# Altium PCB PCB1.PcbDoc
Units mil, origin at the board's own origin, x right, y up, seen from the top; angles counter-clockwise.
Board outline 4370 x 4200 mil, 2 copper layers (Top Layer, Bottom Layer); 73 components, 53 nets, 229 pads, 24 vias.
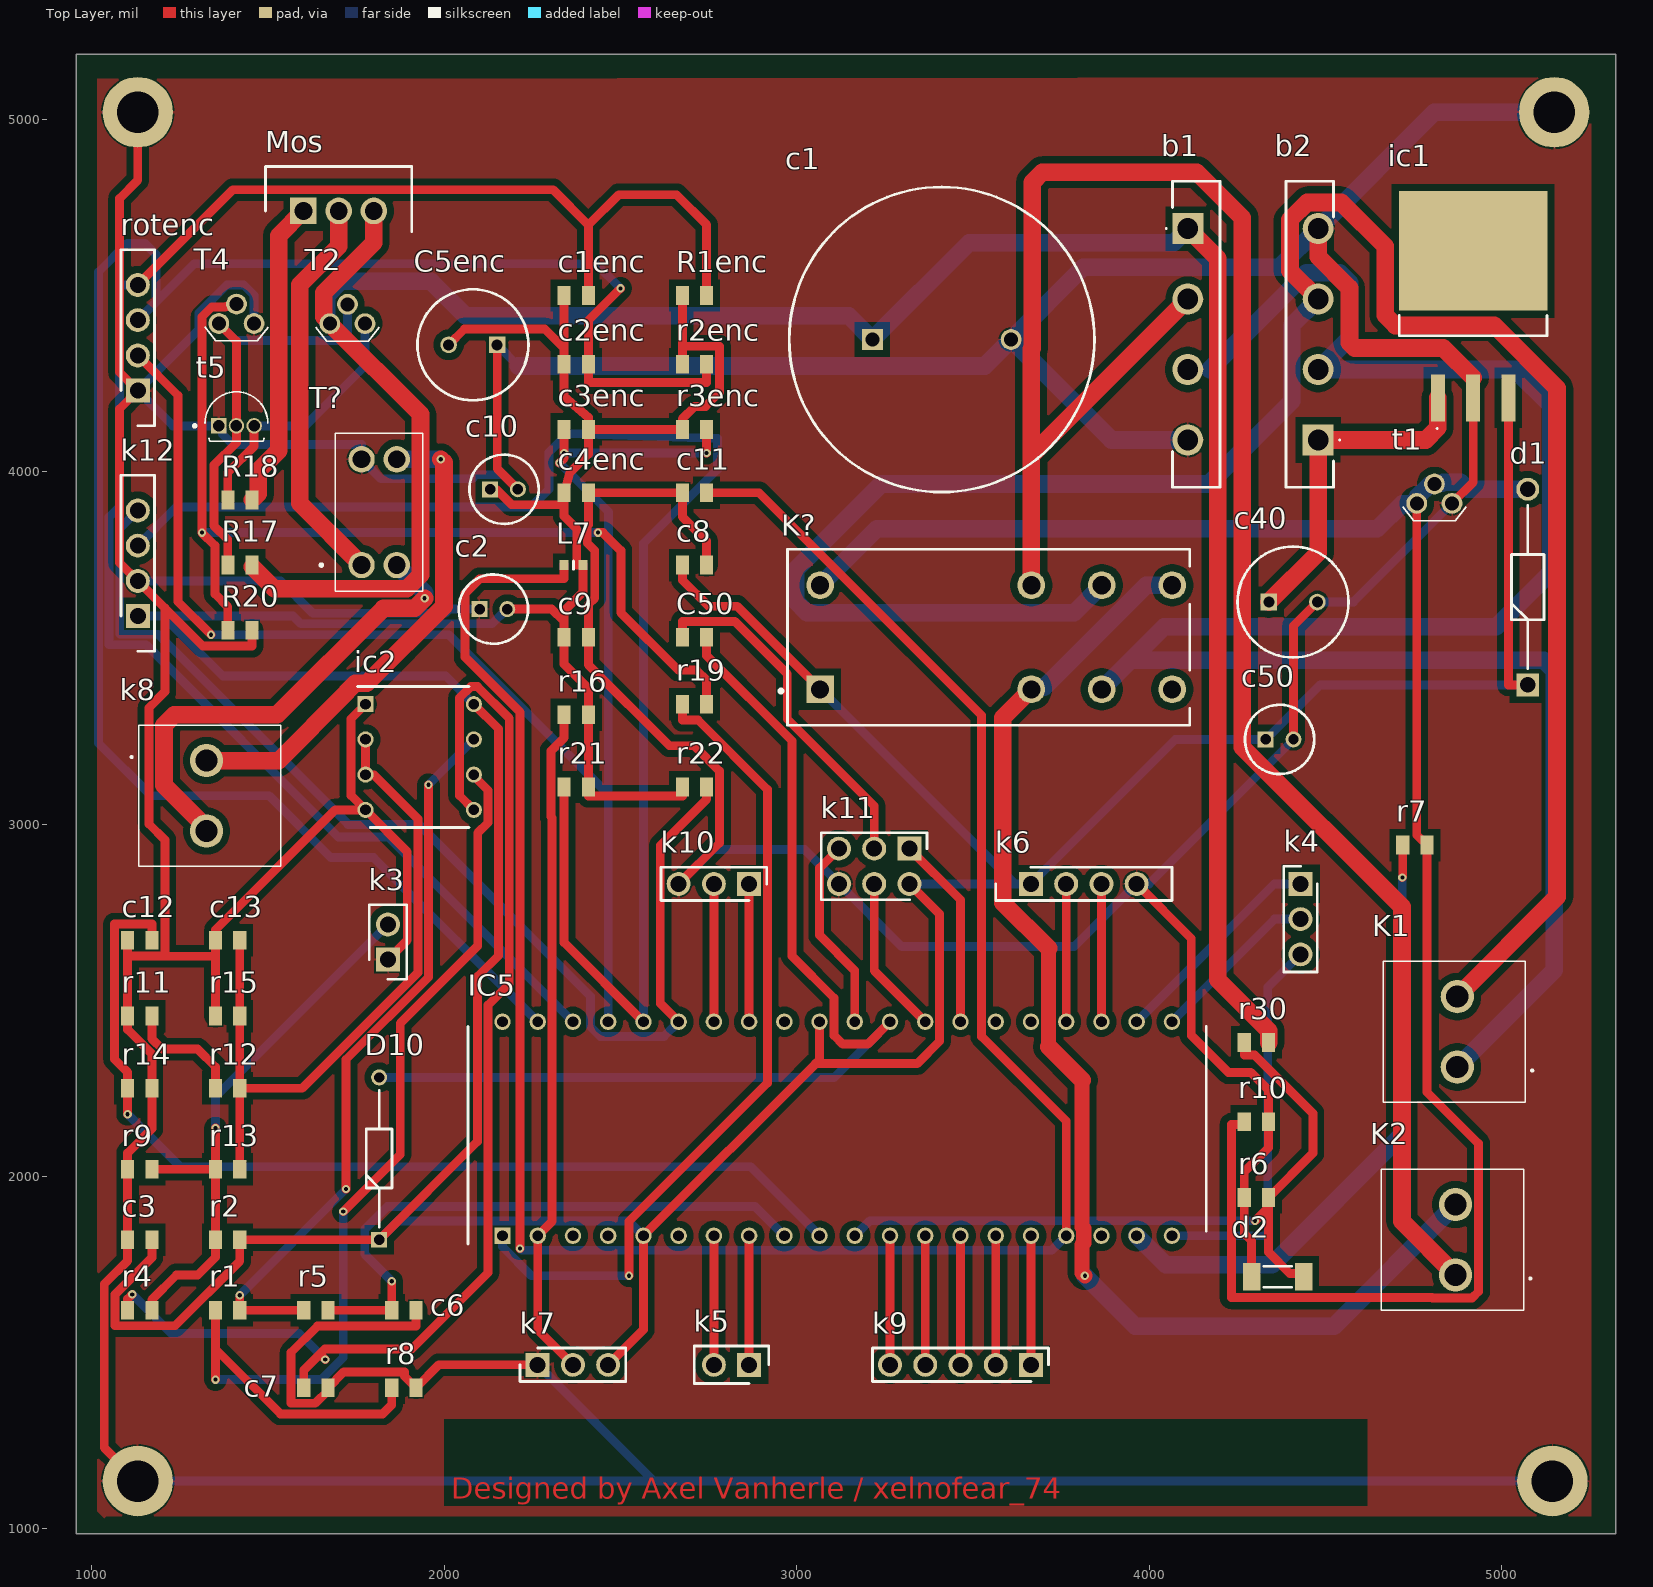
[diagram p0: Top Layer view]
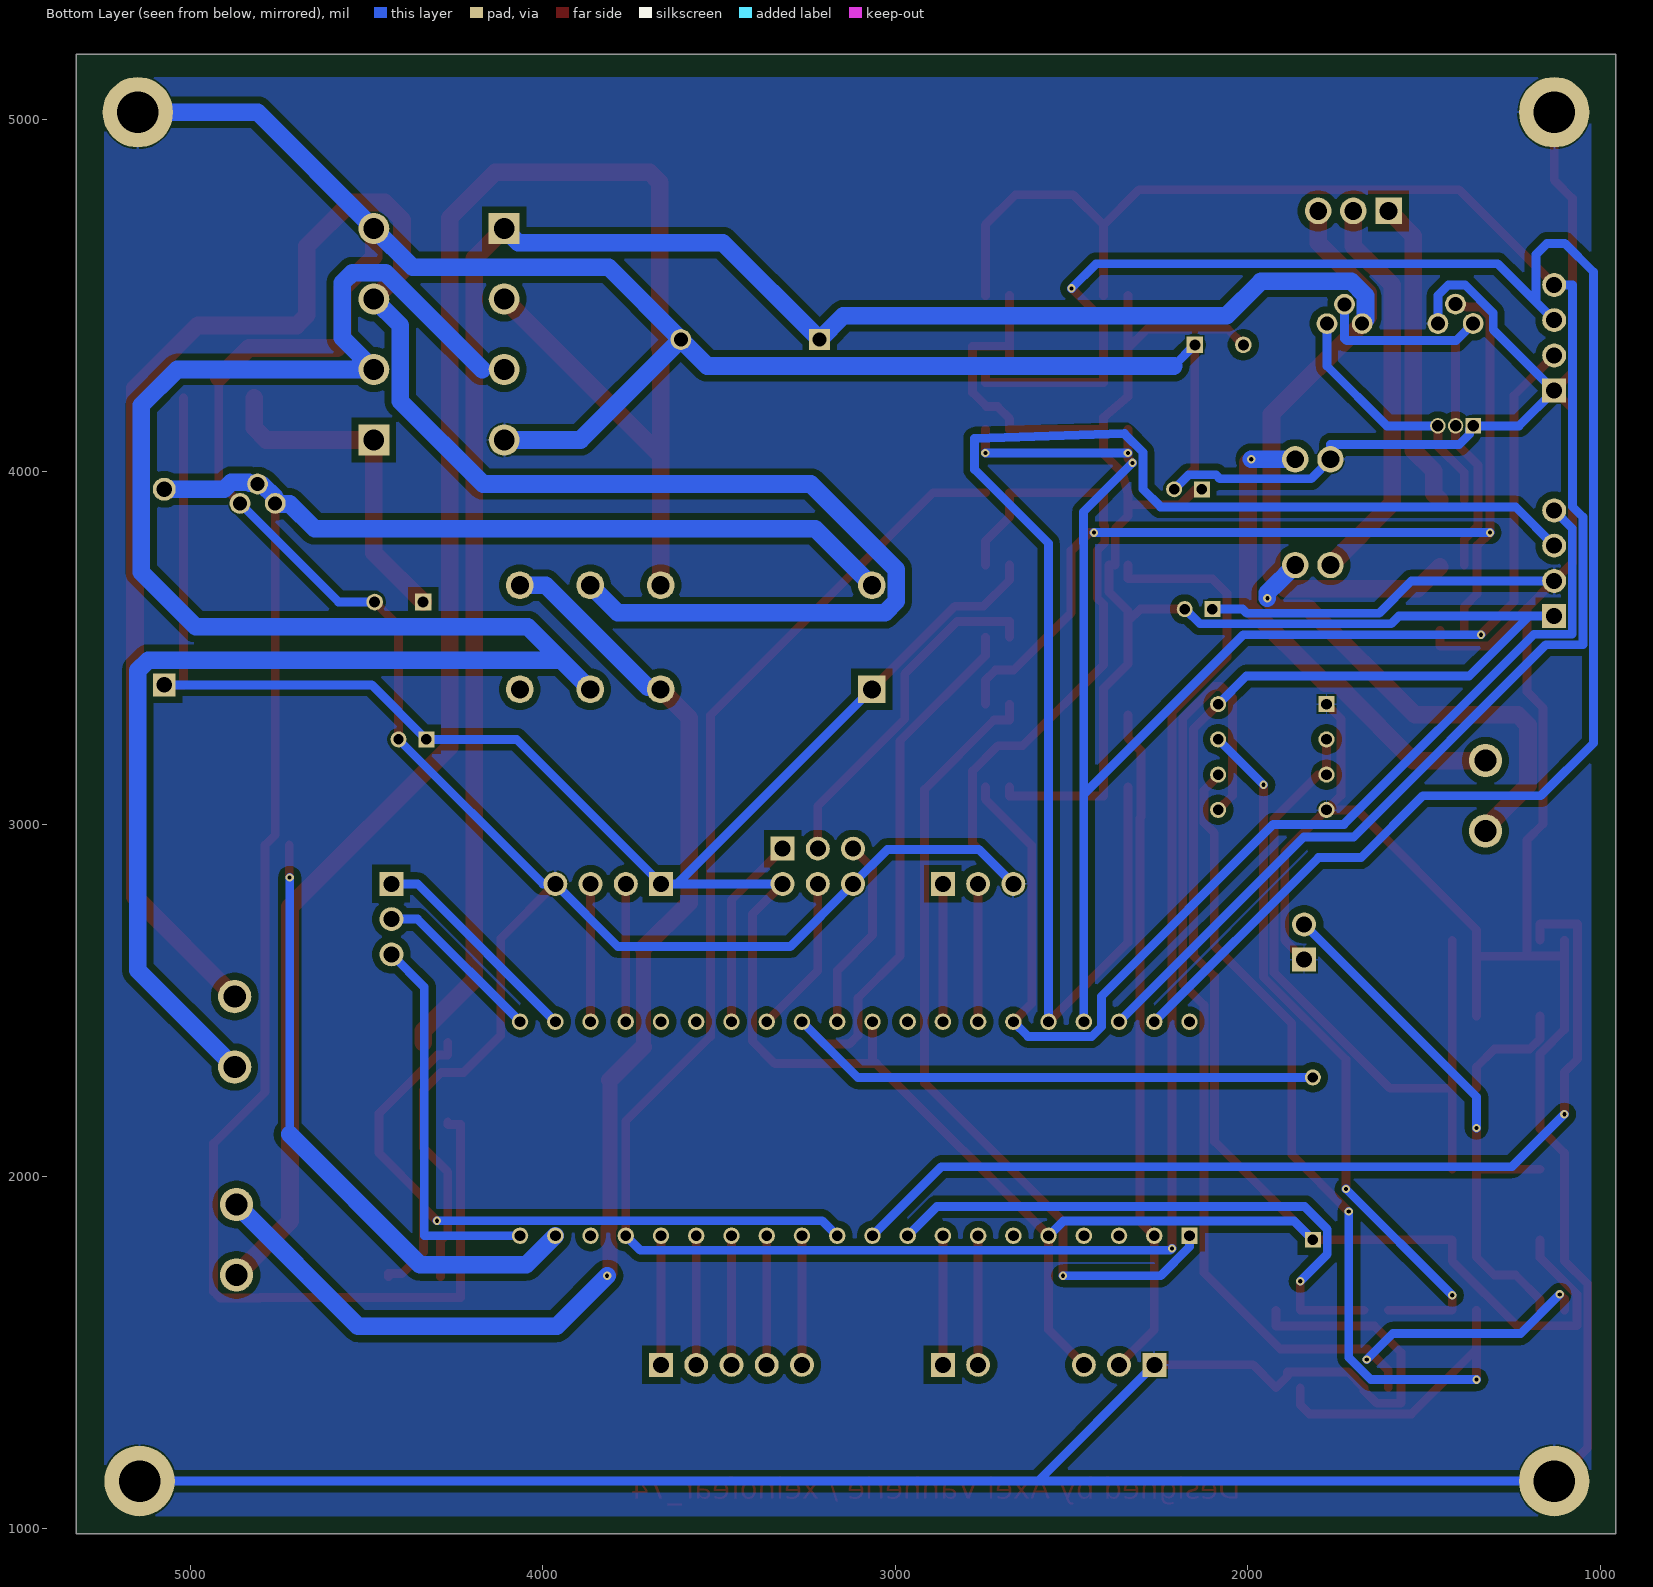
[diagram p1: Bottom Layer view, seen from below]
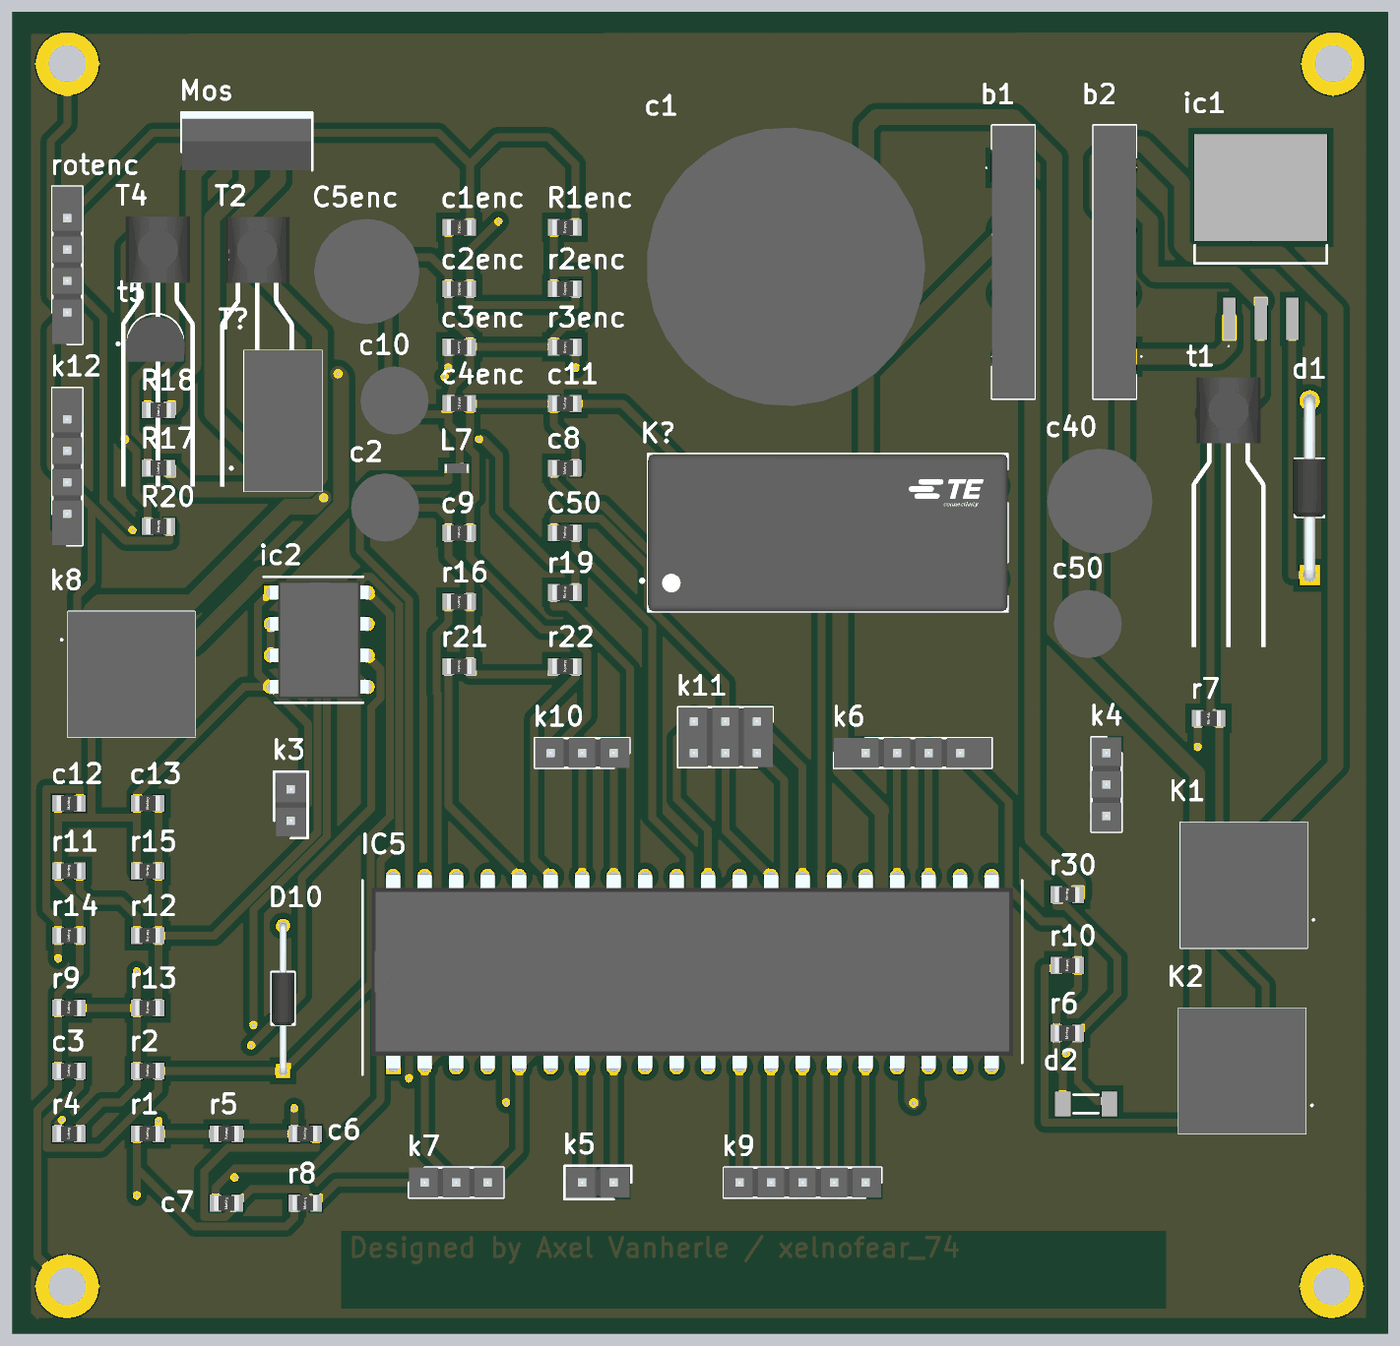
[diagram p2: 3D render of the assembled board from above, using the file's embedded part models]

## Layer stack, top to bottom
Top Solder: solder mask 0.4, Solder Resist, Dk 3.5
Top Layer: signal copper 1.4
Dielectric 1: dielectric 12.6, FR-4, Dk 4.8
Bottom Layer: signal copper 1.4
Bottom Solder: solder mask 0.4, Solder Resist, Dk 3.5

## Board outline
955,985 5325,985 5325,5185 955,5185

## Design rules (kind name [scope] priority, off if disabled: settings)
BoardOutlineClearance [All] p1: gap=7.87 ignorepadtopadclearanceinfootprint=FALSE
Clearance Clearance_8 [InNamedPolygon('GND_L02_P002')] p1: gap=20 ignorepadtopadclearanceinfootprint=FALSE
Clearance Clearance_7 [InNamedPolygon('GND_L01_P001')] p2: gap=20 ignorepadtopadclearanceinfootprint=FALSE
Clearance Clearance_6 [InNamedPolygon('GND_L01_P001')] p3: gap=25 ignorepadtopadclearanceinfootprint=FALSE
Clearance Clearance_5 [InNamedPolygon('NONET_L01_P000')] p4: gap=40 ignorepadtopadclearanceinfootprint=FALSE
Clearance Clearance_4 [InNamedPolygon('NONET_L02_P001')] p5: gap=40 ignorepadtopadclearanceinfootprint=FALSE
Clearance Clearance_3 [InNamedPolygon('NONET_L01_P000')] p6: gap=20 ignorepadtopadclearanceinfootprint=FALSE
Clearance Clearance_2 [InNamedPolygon('GND_L02_P001')] p7: gap=15 ignorepadtopadclearanceinfootprint=FALSE
Clearance Clearance_1 [InNamedPolygon('NONET_L01_P000')] p8: gap=15 ignorepadtopadclearanceinfootprint=FALSE
Clearance [All] p9: gap=5 ignorepadtopadclearanceinfootprint=FALSE except(9.84: Arc-Hole Track-Hole SMDPad-Hole THPad-Hole Via-Hole Fill-Hole Poly-Hole Region-Hole Text-Hole)
ComponentClearance [All] p1: gap=5 collisioncheckmode=3 verticalgap=5 showdistances=TRUE
DiffPairsRouting [All] p1: maxlimit=10 minlimit=5 mostfreqgap=5 toplayer_minwidth=5 toplayer_maxwidth=1000 toplayer_prefwidth=5 bottomlayer_minwidth=5 bottomlayer_maxwidth=1000 bottomlayer_prefwidth=5 maxuncoupledlength=500
Height [All] p1: minheight=0 maxheight=71497.94 prefheight=500
HoleSize [All] p1: absolutevalues=TRUE maxlimit=248.03 minlimit=11.81 maxpercent=80.000 minpercent=20.000
HoleToHoleClearance [All] p1: gap=9.84 allowstackedmicrovias=FALSE
MinimumAnnularRing [All] p1: minimumring=3
MinimumSolderMaskSliver [All] p1: minsoldermaskwidth=0
PlaneClearance [All] p1: clearance=5
PlaneConnect PlaneConnectPowerPads [InPadClass('PowerPads')] p1: planeconnectstyle=Direct reliefexpansion=20 reliefentries=4 reliefconductorwidth=10 reliefairgap=10
PlaneConnect [All] p2: pad.planeconnectstyle=Relief pad.reliefexpansion=11.81 pad.reliefentries=4 pad.reliefconductorwidth=5 pad.reliefairgap=5 via.planeconnectstyle=Direct via.reliefexpansion=11.81 via.reliefentries=4 via.reliefconductorwidth=5 via.reliefairgap=5
PolygonConnect PolygonConnectPowerPads [All vs (InPadClass('PowerPads'))] p1: connectstyle=Direct reliefconductorwidth=10 reliefentries=4 polygonreliefangle="90 Angle" airgapwidth=10
PolygonConnect [All] p2: thpad.connectstyle=Relief thpad.reliefconductorwidth=5 thpad.reliefentries=4 thpad.polygonreliefangle="90 Angle" thpad.airgapwidth=5 smdpad.connectstyle=Relief smdpad.reliefconductorwidth=5 smdpad.reliefentries=4 smdpad.polygonreliefangle="90 Angle" smdpad.airgapwidth=5 via.connectstyle=Direct via.reliefconductorwidth=5 via.reliefentries=4 via.polygonreliefangle="90 Angle" via.airgapwidth=5
RoutingVias [All] p1: holewidth=11.81 width=23.62 viastyle="Through Hole" minholewidth=11.81 minwidth=23.62 maxholewidth=23.62 maxwidth=259.84
SilkToSilkClearance [All] p1: silktosilkclearance=0
SilkToSolderMaskClearance [IsPad] p1: minsilkscreentomaskgap=5 clearancetoexposedcopper=TRUE
SolderMaskExpansion [All] p1: expansion=2.95 istentingtop=FALSE
Width [All] p1: maxlimit=1000 minlimit=20 preferedwidth=25 minimp=50.000000 maximp=50.000000 favimp=50.000000
20 further rules are at their usual default settings.

## Classes and differential pairs
component class deel4: c1enc c2enc c3enc c4enc C5enc c8 c9 c10 c11 C50 D3 D10 IC IC5 k4 k5 k6 k7 k9 k10 k11 k12 L7 R1enc r2enc r3enc r16 r19 r21 r22 rotenc
component class deel3: c2 c3 c6 c7 c12 c13 ic2 k3 r1 r2 r4 r5 r8 r9 r11 r12 r13 r14 r15
component class deel2: b1 b2 c1 c40 c50 d1 d2 ic1 K2 K? r6 r7 r10 r30 t1
component class deel1: k8 Mos R17 R18 R20 T2 T4 t5 T?

## Components (designator, comment, footprint, x,y, rotation, side; value= is the part's Value field where it differs from the comment)
b1 "bruggelijk" bruggelijk 4110,4690 r90 top
b2 "bruggelijk" bruggelijk 4480,4090 r270 top
c1 "elekcap4700uf" Elekcap4700uf 3215,4375 r0 top
c1enc "" 0805 2374.45,4500 r180 top
c2 "elekcap10uf" elekcap10uf 2100,3610 r0 top
c2enc "" 0805 2374.45,4305 r180 top
c3 "keramishecap" 0805 1135.55,1820 r0 top
c3enc "" 0805 2374.45,4120 r0 top
c4enc "" 0805 2374.45,3940 r180 top
C5enc "" elekcap100uf 2150,4360 r180 top
c6 "keramishecap" 0805 1885,1620 r0 top
c7 "keramishecap" 0805 1635.55,1400 r0 top
c8 "keramishecap" 0805 2710,3735 r0 top
c9 "keramishecap" 0805 2374.45,3530 r0 top
c10 "elekcap10uf" elekcap10uf 2130,3950 r0 top
c11 "keramishecap" 0805 2710,3940 r0 top
c12 "keramishecap" 0805 1135.55,2670 r0 top
c13 "keramishecap" 0805 1385,2670 r0 top
c40 "elekcap100uf" elekcap100uf 4340,3630 r0 top
C50 "keramishecap" 0805 2710,3530 r0 top
c50 "elekcap10uf" elekcap10uf 4331.26,3240 r0 top
d1 "1N4007-B" 1n4007 5075,3394.88 r90 top
d2 "zenerdiode" zenerdiode 4365,1715 r180 top
D10 "1N4148" diode1N4148 1815,1820 r90 top
ic1 "dcconv5v" dcconv5v 4920,4475 r0 top
ic2 "dualopam" dualopam 1930,3190 r0 top
IC5 "8bitmcu" 8bitmcu 3115,2135 r90 top
K1 "printkroonsteen" printkroonsteen 4875,2310 r90 top
K2 "printkroonsteen" printkroonsteen 4870,1720 r90 top
k3 "2pin" 2pin 1840,2615 r90 top
k4 "3pin" 3pin 4430,2830 r270 top
k5 "2pin" 2pin 2865,1465 r180 top
k6 "4pin" 4pin 3665,2830 r0 top
k7 "3pin" 3pin 2265,1465 r0 top
k8 "printkroonsteen" printkroonsteen 1325,3180 r270 top
k9 "5pin" 5pin 3665,1465 r180 top
k10 "3pin" 3pin 2865,2830 r180 top
k11 "6pin" 6pin 3320,2930 r180 top
k12 "display" 4pin 1130,3590 r90 top
K? "RT424005F" FP-RT424005F-MFG 3545,3530 r0 top
L7 "Smoorspoel" Smoorspoel 2366.57,3735 r0 top
Mos "pmosfet" pmosfet 1600,4740 r0 top
r1 "18k" 0805 1385,1620 r0 top
R1enc "5mOhm" 0805 2710,4500 r180 top
r2 "1m" 0805 1385,1820 r0 top
r2enc "5mOhm" 0805 2710,4305 r180 top
r3enc "5mOhm" 0805 2710,4120 r180 top
r4 "5k6" 0805 1135.55,1620 r0 top
r5 "5k6" 0805 1635.55,1620 r180 top
r6 "10k" 0805 4305,1940 r0 top
r7 "10k" 0805 4754.45,2940 r0 top
r8 "100" 0805 1885,1400 r0 top
r9 "10m" 0805 1135.55,2020 r0 top
r10 "4k7" 0805 4305,2155 r180 top
r11 "18k" 0805 1135.55,2455 r0 top
r12 "18k" 0805 1385,2250 r180 top
r13 "5k6" 0805 1385,2020 r180 top
r14 "5k6" 0805 1135.55,2250 r0 top
r15 "100" 0805 1385,2455 r0 top
r16 "4k7" 0805 2374.45,3310 r0 top
R17 "4k7" 0805 1420,3735 r0 top
R18 "100" 0805 1420,3920 r0 top
r19 "10k" 0805 2710,3340 r0 top
R20 "4k7" 0805 1420,3550 r180 top
r21 "4k7" 0805 2374.45,3105 r0 top
r22 "4k7" 0805 2710,3105 r180 top
r30 "68k" 0805 4305,2380 r0 top
rotenc "4pin" 4pin 1130,4230 r90 top
t1 "" bc447 4760,3910 r0 top
T2 "BC547CTA" bc447 1675,4420 r0 top
T4 "BC547CTA" bc447 1360,4420.63 r0 top
t5 "BC557C" bc557c 1410,4130 r0 top
T? "Commonmodespoel" commonmodespoel 1765,3735 r0 top

## Footprints (in the part's own frame and the unit in brackets; to place one, negate y for a bottom-side part, rotate by r counter-clockwise, add the part's x,y. Pads: shape width x height; smd on the part's side, far side on the other; paste and mask are expansions set on the pad)
1n4007 [mm]
  rect 1.65x1.65 hole 1.1: 1(0,0)
  round 1.65 hole 1.1: 2(14.1,0)
  silkscreen extent 1.18,-1.18 12.92,1.18, body extent -0.45,-1.35 14.55,1.35, height 2.69
2pin [mm]
  rect 1.725x1.725 hole 1.15: 1(0,0)
  round 1.725 hole 1.15: 2(2.54,0)
  silkscreen extent -1.42,-1.35 3.96,1.35, body extent -1.27,-1.2 3.81,1.2, height 8.43
3pin [mm]
  rect 1.725x1.725 hole 1.15: 1(0,0)
  round 1.725 hole 1.15: 2(2.54,0) 3(5.08,0)
  silkscreen extent -1.27,-1.2 6.35,1.2, body extent -1.27,-1.2 6.35,1.2, height 8.58
4pin [mm]
  rect 1.725x1.725 hole 1.15: 1(0,0)
  round 1.725 hole 1.15: 2(2.54,0) 3(5.08,0) 4(7.62,0)
  silkscreen extent -2.54,-1.2 10.16,1.2, body extent -2.54,-1.2 10.16,1.2, height 8.58
5pin [mm]
  rect 1.725x1.725 hole 1.15: 1(0,0)
  round 1.725 hole 1.15: 2(2.54,0) 3(5.08,0) 4(7.62,0) 5(10.16,0)
  silkscreen extent -1.27,-1.2 11.43,1.2, body extent -1.27,-1.2 11.43,1.2, height 8.58
6pin [mm]
  rect 1.725x1.725 hole 1.15: 1(0,0)
  round 1.725 hole 1.15: 2(0,2.54) 3(2.54,0) 4(2.54,2.54) 5(5.08,0) 6(5.08,2.54)
  silkscreen extent -1.27,-1.14 6.35,3.68, body extent -1.27,-1.14 6.35,3.68, height 8.58
8bitmcu [mm]
  rect 1.184x1.184 hole 0.784: 1(-7.715,24.13)
  round 1.184 hole 0.784: 2(-7.715,21.59) 3(-7.715,19.05) 4(-7.715,16.51) 5(-7.715,13.97) 6(-7.715,11.43) 7(-7.715,8.89) 8(-7.715,6.35) 9(-7.715,3.81) 10(-7.715,1.27) 11(-7.715,-1.27) 12(-7.715,-3.81) 13(-7.715,-6.35) 14(-7.715,-8.89) 15(-7.715,-11.43) 16(-7.715,-13.97) 17(-7.715,-16.51) 18(-7.715,-19.05) 19(-7.715,-21.59) 20(-7.715,-24.13) 21(7.715,-24.13) 22(7.715,-21.59) 23(7.715,-19.05) 24(7.715,-16.51) 25(7.715,-13.97) 26(7.715,-11.43) 27(7.715,-8.89) 28(7.715,-6.35) 29(7.715,-3.81) 30(7.715,-1.27) 31(7.715,1.27) 32(7.715,3.81) 33(7.715,6.35) 34(7.715,8.89) 35(7.715,11.43) 36(7.715,13.97) 37(7.715,16.51) 38(7.715,19.05) 39(7.715,21.59) 40(7.715,24.13)
  silkscreen extent -8.31,-26.61 7.37,26.61, body extent -7.86,-25.88 7.86,25.88, height 6.35
0805 [mm] "Metal Plate Resistor, SMT, body size 2x1.25mm"
  rect 0.95x1.36 smd: 1(-0.875,0) 2(0.875,0)
  body extent -1,-0.62 1,0.63, height 0.35
bc447 [mm]
  round 1.5 hole 1.01: 1(0,0) 2(1.27,1.397) 3(2.54,0)
  silkscreen extent -1.02,-1.26 3.56,-0.24, body extent -1.51,-18.89 4.44,2.88, height 2.6
bc557c [mm]
  rect 1.12x1.12 hole 0.83: 1(-1.27,0)
  round 1.12 hole 0.83: 2(0,0) 3(1.27,0)
  silkscreen extent -3.11,-1.11 2.26,2.45, body extent -2.38,-1.43 2.38,2.19, height 5.33
bruggelijk [mm]
  rect 2.235x2.235 hole 1.49: 1(0,0)
  round 2.235 hole 1.49: 2(-5.08,0) 3(-10.16,0) 4(-15.24,0)
  silkscreen extent -18.65,-2.32 3.41,1.6, body extent -18.65,-2.32 3.4,1.11, height 18.9
commonmodespoel [mil]
  round 75 hole 50: 1(0,0) 2(100,0) 3(100,300) 4(0,300)
  silkscreen extent -118,-74 174,374, body extent -74,-74 174,374, height 378
dcconv5v [mm]
  rect 1x3.4 smd: 1(-2.54,-6.745) 2(0,-6.745) 3(2.54,-6.745)
  rect 10.7x8.6 smd: 4(0,3.855)
  silkscreen extent -5.33,-9 5.33,-0.8
diode1N4148 [mm]
  rect 1.15x1.15 hole 0.75: 1(0,0)
  round 1.15 hole 0.75: 2(11.7,0)
  silkscreen extent 0.93,-0.93 10.77,0.93, body extent -0.28,-0.92 11.93,0.92, height 1.84
dualopam [mm]
  rect 1.158x1.158 hole 0.758: 1(-3.905,3.81)
  round 1.158 hole 0.758: 2(-3.905,1.27) 3(-3.905,-1.27) 4(-3.905,-3.81) 5(3.905,-3.81) 6(3.905,-1.27) 7(3.905,1.27) 8(3.905,3.81)
  silkscreen extent -4.48,-5.08 3.56,5.08, body extent -4.04,-4.75 4.04,4.75, height 5.33
elekcap10uf [mm]
  rect 1.15x1.15 hole 0.75: 1(0,0)
  round 1.15 hole 0.75: 2(2,0)
  silkscreen extent -1.5,-2.5 3.5,2.5, body extent -1.75,-2.75 3.75,2.75, height 12.5
elekcap100uf [mm]
  rect 1.2x1.2 hole 0.8: 1(0,0)
  round 1.2 hole 0.8: 2(3.5,0)
  silkscreen extent -2.25,-4 5.75,4, body extent -2.5,-4.25 6,4.25, height 12.5
Elekcap4700uf [mm]
  rect 1.5x1.5 hole 1: 1(0,0)
  round 1.5 hole 1: 2(10,0)
  silkscreen extent -6,-11 16,11, body extent -6.25,-11.25 16.25,11.25, height 37
FP-RT424005F-MFG [mm]
  round 2 hole 1.3 paste-1000 mask+0: 11(8.15,-3.75) 12(3.07,-3.75) 14(13.23,-3.75) 21(8.15,3.75) 22(3.07,3.75) 24(13.23,3.75) A2(-12.15,3.75)
  rect 2x2 hole 1.3 paste-1000 mask+0: A1(-12.15,-3.75)
  silkscreen extent -15.1,-6.35 14.5,6.35, body extent -14.6,-6.45 14.6,6.45, height 0.25
pmosfet [mm]
  rect 1.92x1.92 hole 1.28: 1(0,0)
  round 1.92 hole 1.28: 2(2.54,0) 3(5.08,0)
  silkscreen extent -2.73,-1.49 7.81,3.2, body extent -2.67,-1.5 7.75,3.19, height 18.84
printkroonsteen [mm]
  round 2.4 hole 1.6: 1(0,0) 2(5.08,0)
  silkscreen extent -2.54,-5.45 7.62,5.35, body extent -2.54,-4.9 7.62,5.35, height 14.1
Smoorspoel [mm]
  rect 0.65x0.7 smd: 1(-0.675,0) 2(0.675,0)
  silkscreen extent 0,-0.3 0,0.3, body extent -0.93,-0.4 0.93,0.4, height 1
zenerdiode [mm]
  rect 1.25x2 smd: 1(-1.875,0) 2(1.875,0)
  silkscreen extent -1,-0.75 1,0.75

## Part data
b1 b2: "Bridge Rectifier", Manufacturer_Name=Vishay, Manufacturer_Part_Number=GBU6J-E3/45, Datasheet Link=http://www.vishay.com/docs/88615/gbu6a.pdf, Height=18.8mm
c1: "Capacitor Polarised", Manufacturer_Name=Kemet, Manufacturer_Part_Number=ESK478M050AQ3AA, Mouser2 Part Number=80-ESK478M050AQ3AA, Datasheet Link=https://componentsearchengine.com//ESK478M050AQ3AA.pdf, Height=37mm, Mouser2 Price/Stock=https://www.mouser.com/Search/Refine.aspx?Keyword=80-ESK478M050AQ3AA
c1enc c2enc c3enc c4enc: library part keramishecap, "Capacitor", Manufacturer_Name=Kemet, Manufacturer_Part_Number=C1206C104K3GACAUTO, Datasheet Link=https://www.kemet.com/specsheet/C1206C104K3GACAUTO, Height=1.8mm
c2 c10 c50: "Capacitor Polarised", Manufacturer_Name=Panasonic, Manufacturer_Part_Number=EEU-FR1H100, Mouser2 Part Number=667-EEU-FR1H100, Datasheet Link=https://componentsearchengine.com//EEU-FR1H100.pdf, Height=12.5mm, Mouser2 Price/Stock=https://www.mouser.com/Search/Refine.aspx?Keyword=667-EEU-FR1H100
c3 c6 c7 c8 c9 c11 c12 c13 C50: "Capacitor", Manufacturer_Name=Kemet, Manufacturer_Part_Number=C1206C104K3GACAUTO, Datasheet Link=https://www.kemet.com/specsheet/C1206C104K3GACAUTO, Height=1.8mm
C5enc: library part elekcap100uf, "Capacitor Polarised", Manufacturer_Name=Kemet, Manufacturer_Part_Number=ESH107M050AG3KA, Datasheet Link=https://connect.kemet.com:7667/gateway/IntelliData-ComponentDocumentation/1.0/download/specsheet/ESH107M050AG3KA, Height=12.5mm
c40: "Capacitor Polarised", Manufacturer_Name=Kemet, Manufacturer_Part_Number=ESH107M050AG3KA, Datasheet Link=https://connect.kemet.com:7667/gateway/IntelliData-ComponentDocumentation/1.0/download/specsheet/ESH107M050AG3KA, Height=12.5mm
d1: "Diode", Manufacturer_Name=Rectron, Datasheet Link=https://www.arrow.com/en/products/1n4007-b/rectron, Manufacturer_Part_Number=1N4007-B
d2: "Zener Diode", Manufacturer_Name=Vishay, Manufacturer_Part_Number=TZMC5V1-GS08, Datasheet Link=https://componentsearchengine.com/Datasheets/2/TZMC5V1-GS08.pdf, Height=1.6mm
D10: "Diode", Manufacturer_Name=Nexperia, Datasheet Link=https://datasheet.datasheetarchive.com/originals/distributors/Datasheets-112/DSAP0040891.pdf, Manufacturer_Part_Number=1N4148
ic1: "Integrated Circuit", Manufacturer_Name="Texas Instruments", Manufacturer_Part_Number=TL780-05CKTTR, Datasheet Link=http://www.ti.com/general/docs/suppproductinfo.tsp?distId=26&gotoUrl=http%3A%2F%2Fwww.ti.com%2Flit%2Fgpn%2Ftl780, Height=5.08mm
ic2: "Integrated Circuit", Manufacturer_Name=Microchip, Manufacturer_Part_Number=MCP6002-E/P, Mouser2 Part Number=579-MCP6002-E/P, Datasheet Link=https://componentsearchengine.com//MCP6002-E_P.pdf, Height=5.334mm, Mouser2 Price/Stock=https://www.mouser.com/Search/Refine.aspx?Keyword=579-MCP6002-E%2FP
IC5: "Integrated Circuit", Manufacturer_Name=Microchip, Manufacturer_Part_Number=ATMEGA4809-PF, Mouser2 Part Number=556-ATMEGA4809-PF, Datasheet Link=https://componentsearchengine.com//ATMEGA4809-PF.pdf, Height=6.35mm, Mouser2 Price/Stock=https://www.mouser.com/Search/Refine.aspx?Keyword=556-ATMEGA4809-PF
K1 K2 k8: "Connector", Manufacturer_Name="CUI Inc.", Manufacturer_Part_Number=TB007-508-02BE, Mouser2 Part Number=490-TB007-508-02BE, Datasheet Link=https://componentsearchengine.com//TB007-508-02BE.pdf, Height=14mm, Mouser2 Price/Stock=https://www.mouser.com/Search/Refine.aspx?Keyword=490-TB007-508-02BE
k3 k5: "Connector", Manufacturer_Name=Amphenol, Manufacturer_Part_Number=10129378-902001BLF, Datasheet Link=https://www.mouser.co.uk/datasheet/2/18/10129378-1530218.pdf, Height=8.43mm
k4 k7 k10: "Connector", Manufacturer_Name=Amphenol, Manufacturer_Part_Number=10129378-903001BLF, Height=8.58mm
k6 rotenc: "Connector", Manufacturer_Name=Amphenol, Manufacturer_Part_Number=10129378-904001BLF, Datasheet Link=https://cdn.amphenol-icc.com/media/wysiwyg/files/drawing/10129378.pdf, Height=8.58mm
k9: "Connector", Manufacturer_Name="FCI Electronics", Manufacturer_Part_Number=10129378-905001BLF, Datasheet Link=https://cdn.amphenol-icc.com/media/wysiwyg/files/drawing/10129378.pdf, Height=8.58mm
k11: "Connector", Manufacturer_Name=Amphenol, Manufacturer_Part_Number=10129381-906002BLF, Mouser2 Part Number=649-1012938190602BLF, Datasheet Link=https://componentsearchengine.com//10129381-906002BLF.pdf, Height=8.58mm, Mouser2 Price/Stock=https://www.mouser.com/Search/Refine.aspx?Keyword=649-1012938190602BLF
k12: library part 4pin, "Connector", Manufacturer_Name=Amphenol, Manufacturer_Part_Number=10129378-904001BLF, Datasheet Link=https://cdn.amphenol-icc.com/media/wysiwyg/files/drawing/10129378.pdf, Height=8.58mm
K?: library part CMP-03395-000296-1, "RELAY GENERAL PURPOSE DPDT 8A 5V", Coil Current=80.6mA, Coil Power=500mW, Coil Resistance=62R, Coil Voltage (DC)=5V, Contact Current Rating=8A, Contact Voltage Rating (AC)=250V, Dropout Voltage=500mV, Max Operating Temperature=85°C, Max Voltage Rating (AC)=400V, Min Operating Temperature=-40°C, Package Quantity=5000, Power Consumption=400mW, Coil Type=Non-Latching, Contact Material=Silver, ELV=Compliant, Height=15.7mm, Lead Free="Lead Free", Length=29mm, Mount="Through Hole", Operate Time=7ms, Packaging=Carton, Radiation Hardening=No, Relay Type="General Purpose", Release Time=3ms, RoHS Compliant=Yes, Series=RT2, Termination=PCB, Throw Configuration=DPDT, Weight=13g, Width=12.7mm
L7: "Inductor", Manufacturer_Name="Murata Electronics", Manufacturer_Part_Number=LQM18FN1R0M00D, Datasheet Link=https://psearch.en.murata.com/inductor/product/LQM18FN1R0M00%23.html, Height=0.9mm
Mos: "MOSFET (P-Channel)", Manufacturer_Name=Infineon, Manufacturer_Part_Number=IRF9Z34NPBF, Mouser2 Part Number=942-IRF9Z34NPBF, Datasheet Link=https://componentsearchengine.com//IRF9Z34NPBF.pdf, Height=4.69mm, Mouser2 Price/Stock=https://www.mouser.com/Search/Refine.aspx?Keyword=942-IRF9Z34NPBF
r1 r2 r4 r5 r6 r7 r8 r9 r10 r11 r12 r13 r14 r15 r16 R17 R18 r19 R20 r21 r22 r30: library part weerstand0805, "WRIS-PSMB SMT Metal Plate Resistor, size 0805, 5mOhm, 0.5W", Manufacturer="Wurth Elektronik", Manufacturer Part Number=580060720003, Operating Temperature="-55 to +155degC", Rated Current=10A, Rated Power=0.5W, Resistance=5mOhm, Resistance Tolerance=+/-1%, Temperature Coefficient of Resistance=+/-100ppm/degC, ComponentLink1Description=Manufacturer, ComponentLink1URL=http://www.we-online.de, ComponentLink2Description=Datasheet, ComponentLink2URL=https://www.we-online.com/catalog/datasheet/580060720003.pdf, Height=0.35mm, Length=2mm, Mounting Technology=SMT, Packaging="Tape and Reel", Published Date="May 2020", Size=0805, Technical Reference=MB0805R005F102KAATP0000, Width=1.25mm
R1enc r2enc r3enc: library part weerstand0805, "WRIS-PSMB SMT Metal Plate Resistor, size 0805, 5mOhm, 0.5W", Manufacturer="Wurth Elektronik", Manufacturer Part Number=580060720003, Operating Temperature="-55 to +155degC", Rated Current=10A, Rated Power=0.5W, Resistance Tolerance=+/-1%, Temperature Coefficient of Resistance=+/-100ppm/degC, ComponentLink1Description=Manufacturer, ComponentLink1URL=http://www.we-online.de, ComponentLink2Description=Datasheet, ComponentLink2URL=https://www.we-online.com/catalog/datasheet/580060720003.pdf, Height=0.35mm, Length=2mm, Mounting Technology=SMT, Packaging="Tape and Reel", Published Date="May 2020", Resistance=5mOhm, Size=0805, Technical Reference=MB0805R005F102KAATP0000, Width=1.25mm
t1: library part BC547CTA, "Transistor BJT NPN", Manufacturer_Name="ON Semiconductor", Datasheet Link=http://www.onsemi.com/pub/Collateral/BC550-D.pdf, Manufacturer_Part_Number=BC547CTA
T2 T4: "Transistor BJT NPN", Manufacturer_Name="ON Semiconductor", Datasheet Link=http://www.onsemi.com/pub/Collateral/BC550-D.pdf, Manufacturer_Part_Number=BC547CTA
t5: "Bipolar (BJT) Transistor PNP 30V 100mA 150MHz 500mW Through Hole TO-92-3", Package=None, Availability=Unavailable, MP=BC557CZL1G, Price=None
T?: "Transformer", Manufacturer_Name="Laird Technologies", Manufacturer_Part_Number=CM2545X171B-10, Datasheet Link=https://datasheet.datasheetarchive.com/originals/dk/DKDS-7/122753.pdf, Height=9.5mm

## Free pads (board coordinates)
  round 200 hole 118.11: Ja(1130,1135) Ja(1130,5020) Ja(5145,1135) Ja(5150,5020)

## Via types
v1: diameter 23.62, hole 11.81, Top Layer to Bottom Layer, 24 vias

## Nets (pads, with @x,y where several pads share a name; then routed paths per layer and width w, separated by ;. In a path a pad name is that pad's centre, name@x,y a point inside that pad or via, vN(x,y) a via of type N, cw(c..) or ccw(c..) an arc to the next point about the centre after c; other vN are vias at no path point)
+5: c1enc.2 c2.2 c2enc.2 c3.2 c3enc.2 c4enc.2 C5enc.2 c8.1 c9.1 c10.1 c50.1 d1.1 D10.1 ic1.3 ic2.8 IC5.5 IC5.31 k6.1 k7.3 k11.2 k12.1 K?.A1 L7.2 R1enc.2 r2.2 r2enc.2 r3enc.2 r16.2 r21.2 r22.2 | length 15488.3
  Top Layer w25: c3.2 1170,1769.37 1064.9,1664.27 1064.9,1575.73 1235.73,1575.73 1419.45,1759.45 r2.2 D10.1 2094.19,2099.19 2094.19,2567 2154.04,2626.84 2154.04,3269.7 ic2.8 ; C5enc.2 2057.2,4405 2285,4405 2340,4350 ; c10.1 2147,3950 2191,3906 2340,3906 ; c2.2 2305,3610 2340,3575 ; c1enc.2 2340,4350 ; k7.3 2565,1565 IC5.5 3053.74,2320 ; r22.2 2675.55,3079.04 2408.9,3079.04 r21.2 r16.2 2408.9,3385 2340,3453.9 c9.1 2340,3575 ; c8.1 2675.55,3692.45 2750,3618 2831.02,3618 K?.A1 ; r2enc.2 2675.55,4356 ; R1enc.2 2675.55,4356 ; IC5.31 3065,2331.26 3053.74,2320 ; k11.2 3405.81,2744.19 3405.81,2384 3341.81,2320 3053.74,2320 ; ic1.3 5020,3394.88 d1.1 ; 2340,3575 2340,3605 2393.15,3658.15 L7.2 2375.69,3735 2375.69,3838 2340,3873.69 2340,3906 ; 2340,3906 c4enc.2 2355.9,3997 2408.9,4050 c3enc.2 ; 2340,4350 c2enc.2 2340,4213 2408.9,4154.1 c3enc.2 ; c3enc.2 r3enc.2 2675.55,4150 2710.38,4184.82 2740.82,4184.82 2781,4225 2781,4356 2675.55,4356
  Bottom Layer w25: k12.1 1201.62,3590 ; D10.1 1868,1873 2523.26,1873 IC5.5 ; ic2.8 2003.74,3420 1371.62,3420 1201.62,3590 ; c2.2 2177.2,3610 2135.45,3568.25 1592.75,3568.25 1571,3590 1201.62,3590 ; K?.A1 3619.02,2830 ; k11.2 3619.02,2830 ; d1.1 4486.14,3394.88 c50.1 4075,3240 k6.1 3619.02,2830
GND: b1.4 b2.4 c1.2 c2.1 c3.1 c4enc.1 C5enc.1 c6.2 c7.2 c8.2 c9.2 c10.2 c11.1 c12.1 c13.1 c40.2 c50.2 d2.2 ic1.2 ic2.1 ic2.4 k3.1 k6.4 k7.1 k10.3 k11.6 k12.2 pad.Ja r6.1 r8.2 r9.1 r10.1 r11.1 r14.2 r15.1 R20.1 rotenc.1 t1.3 T4.3 t5.1 T?.4 | length 27004.9
  Top Layer w25: c12.1 1101.1,2625 ; pad.Ja@1130,1135 1034.9,1230.1 1034.9,1694.27 1101.1,1760.47 c3.1 r9.1 1101.1,2066.1 1170,2135 r14.2 1170,2348 1101.1,2416.9 r11.1 1101.1,2624.55 ; pad.Ja@1130,5020 1130,4827 1078,4775 1078,4282 rotenc.1 1078,4178 1078,3742 k12.2 1207,3613 ; r15.1 1350.55,2624.55 ; R20.1 1454.45,3505 1315,3505 1207,3613 ; ic2.1 1735,3298.74 1735,3081.26 ic2.4 ; k3.1 1895,2670 1895,2921.26 ic2.4 ; c6.2 1919.45,1575 1639.9,1575 1564.9,1500 1564.9,1355.73 1633.73,1355.73 1670,1392 c7.2 1715,1445 1887,1445 1887,1432.45 r8.2 1984.45,1465 k7.1 ; C5enc.1 2150,4008.74 c10.2 ; k10.3 2781,2946 2781,3150 2709,3222 2638.9,3222 2408.9,3452 c9.2 2408.9,3623 2427,3641.1 2427,3776.37 2405.69,3797.68 2405.69,3846.1 2408.9,3849.31 c4enc.1 c11.1 2675.55,3871.9 2744.45,3803 c8.2 ; k6.4 4120,2675 4120,2400 4225,2295 4289,2295 4339.45,2244.55 r10.1 4339.45,2081.9 4270.55,2013 r6.1 4270.55,1837.63 4291.18,1817 d2.2 ; c50.2 4410,3562.2 c40.2 ; t1.3 4920,3970 ic1.2 ic1.2@4920,4266 ; 1101.1,2624.55 1207,2624.55 1350.55,2624.55 ; 1101.1,2624.55 1101.1,2625 ; 1101.1,2625 1207,2625 1207,2955.01 1161.89,3000.11 1161.89,3330.12 1207,3375.23 1207,3613 ; 1350.55,2624.55 c13.1 1350.55,2700 1690.55,3040 ic2.4
  Top Layer w50: b2.4 4480,4610 4568.89,4521.11 4568.89,4365.76 4583.53,4351.11 4834.89,4351.11 ic1.2@4920,4266
  Bottom Layer w25: pad.Ja@1130,1135 2595,1135 ; k12.2 1535,3690 1626.75,3598.25 2002.25,3598.25 2014,3610 c2.1 ; T4.3 1460,4500 1430,4530 1383,4530 1303,4450 1303,4403 rotenc.1 1230,4130 t5.1 1370,4120 1370,4107 1400,4077 1765,4077 T?.4 1820,3980 2079,3980 2090,3991 2167.74,3991 c10.2 ; C5enc.1 2210,4300 ; k7.1 2595,1135 ; k10.3 2763,2928 3022,2928 k11.6 3298,2652 3787,2652 k6.4 4000,2830 c50.2 ; c40.2 4580,3630 t1.3 ; pad.Ja@5145,1135 2595,1135
  Bottom Layer w50: 2210,4300 3533.7,4300 c1.2 ; b1.4 3893.7,4090 c1.2 ; pad.Ja@5150,5020 4810,5020 b2.4 4370,4580 3813.7,4580 c1.2
Netb1_2: b1.2 K2.1 K?.22 | length 5686.1
  Top Layer w50: K?.22 3665.87,4045.87 ; b1.2 3665.87,4045.87 ; K2.1 4718,1872 4718,2765 4265,3218 4265,4721 4136,4850 3697.52,4850 3668.23,4820.71 3668.23,4350.34 3665.87,4347.98 3665.87,4045.87
Netb1_3: b1.3 b2.2 K1.1 K?.11 | length 5909.4
  Bottom Layer w25: b1.3 4172,4290
  Bottom Layer w50: K?.11 3948.5,3465 ; 4172,4290 4447,4565 4540.71,4565 4570,4535.71 4570,4380 b2.2 5038,4290 5140,4188 5140,3715 4985,3560 4043.5,3560 3948.5,3465 ; K1.1 5150,2585 5150,3435.71 5120.71,3465 3948.5,3465
Netb2_1: b2.1 c40.1 ic1.1 | length 956.9
  Top Layer w50: c40.1 4480,3770 b2.1 4785,4090 4820,4125 ic1.1
Netb2_3: b2.3 K1.2 K?.21 | length 6144.3
  Top Layer w50: b2.3 4400,4570 4400,4714.65 4449.35,4764 4546,4764 4670,4640 4670,4444.29 4699.29,4415 4980,4415 5158,4237 5158,2793 K1.2
  Bottom Layer w50: K?.21 3788.23,3600 3029.29,3600 2997.28,3632.01 2997.28,3722.28 3240,3965 4170,3965 4405,4200 4405,4415 b2.3
Netc1enc_1: c1enc.1 IC5.38 R1enc.1 rotenc.4 | length 5084.4
  Top Layer w25: rotenc.4 1400,4800 2308.9,4800 2408.9,4700 ; c1enc.1 2408.9,4700 ; R1enc.1 2744.45,4700.55 2659.1,4785.9 2494.8,4785.9 2408.9,4700
  Bottom Layer w25: rotenc.4 1078,4530 1078,3900.92 1048.54,3871.46 1048.54,3508.54 1153.79,3508.54 1699.3,2963.04 1840.7,2963.04 IC5.38
Netc2enc_1: c2enc.1 IC5.39 r2enc.1 rotenc.3 | length 5413.1
  Top Layer w25: v1(2500,4520.1) 2408.9,4429 c2enc.1 2408.9,4253 2744.45,4253 r2enc.1
  Bottom Layer w25: rotenc.3 1182,4482 ; IC5.39 1798.74,2905 1678,2905 1503,3080 1168,3080 1018.54,3229.46 1018.54,4566.54 1100,4648 1150,4648 1182,4616 1182,4482 ; v1(2500,4520.1) 2430.1,4590 1290,4590 1182,4482
Netc3enc_1: c3enc.1 IC5.37 r3enc.1 rotenc.2 | length 4409.9
  Top Layer w25: rotenc.2 1244,4216 1244,3631 v1(1338,3537) ; v1(2327,4025) 2340,4038 v1(2340,4053) c3enc.1 ; v1(2744.45,4053) r3enc.1
  Bottom Layer w25: v1(1338,3537) 2012,3537 2465,3084 ; v1(2327,4025) 2466,3886 2466,3797.69 2465,3796.69 2465,3084 ; v1(2340,4053) v1(2744.45,4053) ; IC5.37 2465,3084
Netc6_1: c6.1 IC5.9 r5.1 | length 1694
  Top Layer w25: r5.1 c6.1 v1(1850.55,1702.45)
  Bottom Layer w25: v1(1850.55,1702.45) 1774,1779 1774,1850 1838,1914 2882.26,1914 IC5.9
Netc7_1: c7.1 ic2.5 r4.1 | length 3508.7
  Top Layer w25: r4.1 1101.1,1652 v1(1114.1,1665) ; c7.1 1601.1,1450 1646.55,1495.45 ; v1(1662,1480) 1646.55,1495.45 ; ic2.5 2043,3080.74 2043,3358 2075,3390 2094,3390 2184.04,3299.96 2184.04,2546.04 2124.19,2486.19 2124.19,1727.19 1907,1510 1661.1,1510 1646.55,1495.45
  Bottom Layer w25: v1(1114.1,1665) 1225.1,1554 1588,1554 v1(1662,1480)
Netc11_2: c11.2 IC5.17 L7.1 | length 6449.9
  Top Layer w25: v1(2215,1795) 2215,3317 2059,3473 2059,3655 2100,3696 2340,3696 L7.1 ; c11.2 2893,3940 3525,3308 3525,2456.45 3524.19,2455.64 3524.19,2421.84 3525,2421.03 3525,2397 3765,2157 IC5.17
  Bottom Layer w25: v1(2215,1795) 2220,1790 3723.74,1790 IC5.17
Netc12_2: c12.2 IC5.10 r14.1 | length 2814.1
  Top Layer w25: v1(1101.1,2176) r14.1 1101.1,2295 1064,2332.1 1064,2716 1170,2716 c12.2
  Bottom Layer w25: v1(1101.1,2176) 1250.1,2027 2869.26,2027 IC5.10
Netc13_2: c13.2 ic2.2 ic2.3 r12.1 r13.1 r15.2 | length 2028.9
  Top Layer w25: r13.1 r12.1 ; c13.2 r15.2 r12.1 ; ic2.2 ic2.3 1800,3140 1925,3015 1925,2578 1597,2250 r12.1
NetC50_1: C50.1 k11.3 | length 1002.5
  Top Layer w25: C50.1 2675.55,3575 2824,3575 2973,3426 2973,3298 3220,3051 k11.3
NetC50_2: C50.2 D10.2 IC5.29 | length 2990.7
  Top Layer w25: C50.2 2744.45,3478 2987,3235.45 2987,2625 3106,2506 3106,2400 3130.59,2375.41 3201.67,2375.41 IC5.29
  Bottom Layer w25: D10.2 3106.89,2280.63 IC5.29
Netd1_2: d1.2 K?.A2 r7.2 r10.2 t1.1 t1.2 | length 5699.2
  Top Layer w25: r10.2 4270.55,2147 4234,2147 4234,1656 4804,1656 4805,1655 4917,1655 4935,1673 4935,2093 4788.9,2239.1 r7.2 4760,2968.9 t1.1
  Bottom Layer w50: K?.A2 3227.02,3838 4648,3838 4718.27,3908.27 4758.27,3908.27 4761.73,3911.73 4761.73,3928.39 4796.61,3963.27 4806.48,3963.27 t1.2@4808.21,3965 ; t1.2 4811.73,3966.73 4832.55,3966.73 4835.34,3969.53 4884.66,3969.53 4904.18,3950 d1.2
Netd2_1: d2.1 IC5.11 r6.2 r30.1 | length 2086.8
  Top Layer w25: r30.1 4270.55,2344 4300,2344 4465,2179 4465,2065.55 r6.2 4339.45,1912.45 ; v1(4301,1874) 4339.45,1912.45 ; d2.1 4438.82,1724 4400,1724 4339.45,1784.55 4339.45,1912.45
  Bottom Layer w25: IC5.11 3207.74,1874 v1(4301,1874)
Netic2_6: ic2.6 r1.1 r8.1 | length 3062.2
  Top Layer w25: v1(1350.55,1423) 1350.55,1510.08 ; r1.1 1350.55,1510.08 ; v1(1713,1900) 1875,2062 1875,2434 2095,2654 2095,2975 2124.04,3004.04 2124.04,3096 2083.74,3136.3 ic2.6 ; r8.1 1850.55,1351.28 1825,1325.73 1534.9,1325.73 1350.55,1510.08
  Bottom Layer w25: v1(1350.55,1423) 1650,1423 1713,1486 v1(1713,1900)
Netic2_7: ic2.7 r1.2 r5.2 | length 2076.8
  Top Layer w25: v1(1419.45,1662.45) r1.2 r5.2 ; v1(1721,1964) 1721,2331.57 1955,2565.57 v1(1955,3111.26)
  Bottom Layer w25: v1(1419.45,1662.45) v1(1721,1964) ; v1(1955,3111.26) ic2.7
NetIC5_1: IC5.1 r19.1 | length 2335.1
  Top Layer w25: v1(2524,1718) 2524,1872 2917,2265 2917,3098 2720,3295 2675.55,3295 r19.1
  Bottom Layer w25: IC5.1 2165,1800 2247,1718 v1(2524,1718)
NetIC5_2: IC5.2 k7.2 r16.1 | length 1920
  Top Layer w25: r16.1 2340,3245 2303,3208 2303,3021 2306,3018 2306,1872.26 IC5.2 2265,1565 k7.2
NetIC5_7: IC5.7 k5.2 | length 366.3
  Top Layer w25: k5.2 IC5.7
NetIC5_8: IC5.8 k5.1 | length 366.3
  Top Layer w25: k5.1 IC5.8
NetIC5_12: IC5.12 k9.5 | length 366.3
  Top Layer w25: k9.5 IC5.12
NetIC5_13: IC5.13 k9.4 | length 366.3
  Top Layer w25: k9.4 IC5.13
NetIC5_14: IC5.14 k9.3 | length 366.3
  Top Layer w25: k9.3 IC5.14
NetIC5_15: IC5.15 k9.2 | length 366.3
  Top Layer w25: k9.2 IC5.15
NetIC5_16: IC5.16 k9.1 | length 366.3
  Top Layer w25: k9.1 IC5.16
NetIC5_19: IC5.19 r7.1 | length 1762.7
  Top Layer w25: v1(4719,2848) 4720,2849 r7.1
  Bottom Layer w25: 4719,2119 v1(4719,2848)
  Bottom Layer w50: IC5.19 4047.26,1749 4349,1749 4719,2119
NetIC5_20: IC5.20 k4.3 | length 1109.3
  Bottom Layer w25: IC5.20 4337,1831.26 4337,2537 k4.3
NetIC5_21: IC5.21 k4.2 | length 485.6
  Bottom Layer w25: IC5.21 4356.26,2730 k4.2
NetIC5_22: IC5.22 k4.1 | length 627.1
  Bottom Layer w25: IC5.22 4356.26,2830 k4.1
NetIC5_23: IC5.23 k6.3 | length 391.3
  Top Layer w25: IC5.23 k6.3
NetIC5_24: IC5.24 k6.2 | length 391.3
  Top Layer w25: IC5.24 k6.2
NetIC5_27: IC5.27 k11.1 | length 551.3
  Top Layer w25: k11.1 3465,2785 IC5.27
NetIC5_28: IC5.28 k11.4 | length 451.3
  Top Layer w25: k11.4 3220,2583.74 IC5.28
NetIC5_30: IC5.30 k11.5 | length 555.5
  Top Layer w25: k11.5 3065,2875 3065,2684 3165,2584 IC5.30
NetIC5_33: IC5.33 k10.1 | length 391.3
  Top Layer w25: IC5.33 k10.1
NetIC5_34: IC5.34 k10.2 | length 391.3
  Top Layer w25: IC5.34 k10.2
NetIC5_35: IC5.35 k12.4 r22.1 | length 3242
  Top Layer w25: IC5.35 2613,2490.74 2613,2938.55 2744.45,3070 r22.1
  Bottom Layer w25: k12.4 1078.54,3838.54 1078.54,3538.54 1187.34,3538.54 1726.88,2999 1927,2999 2415,2511 2415,2425 2443,2397 2623.26,2397 IC5.35
NetIC5_36: IC5.36 k12.3 r21.1 | length 4340.2
  Top Layer w25: r21.1 2340,2663.74 IC5.36
  Bottom Layer w25: k12.3 1240,3900 2247,3900 2297,3950 2297,4055 2350,4108 2775,4094 2775,4006 2565,3796 IC5.36
NetK2_2: K2.2 K?.12 K?.24 | length 3574.8
  Top Layer w43: 3715,2368 3715,2647 ; 3810,2273 3810,1856.7 3814.81,1851.89 3814.81,1810.63 3810,1805.82 3810,1726 v1(3818,1718)
  Top Layer w50: K?.12 3585,3301.5 3585,2777 3715,2647 ; 3715,2368 3810,2273
  Bottom Layer w50: K?.12 3671.37,3387.86 3702.86,3387.86 3992.64,3677.64 K?.24 ; v1(3818,1718) 3961,1575 4525,1575 K2.2
Netk3_2: k3.2 r2.1 r4.2 r9.2 r13.2 | length 1588.2
  Top Layer w25: r4.2 1170,1650 1240,1720 1300,1720 1350.55,1770.55 r2.1 r13.2 ; r9.2 r13.2 ; v1(1350.55,2137) r13.2
  Bottom Layer w25: v1(1350.55,2137) 1350.55,2225.55 k3.2
Netk8_1: k8.1 T?.3 | length 1402.2
  Top Layer w50: k8.1 1530,3180 1723.46,3373.46 1723.46,3375.22 1747.23,3398.98 1780.01,3398.98 1998.99,3617.96 1998.99,3626.65 1998.99,4026.01 v1(1990,4035)
  Bottom Layer w50: T?.3 v1(1990,4035)
Netk8_2: k8.2 T?.2 | length 1478.7
  Top Layer w50: k8.2 1325,2989.35 1204.39,3109.96 1204.39,3280.67 1233.68,3309.96 1524.96,3309.96 1827.5,3612.5 1915.74,3612.5 v1(1943.99,3640.75)
  Bottom Layer w25: 1924.87,3659.87 1924.87,3675.13 ; 1935.15,3649.59 v1(1943.99,3640.75)
  Bottom Layer w50: T?.2 1924.87,3675.13 ; T?.2@1865.08,3734.93 1943.99,3656.02 v1(1943.99,3640.75)
NetMos_1: Mos.1 R18.2 | length 880.3
  Top Layer w50: R18.2 1472.21,3937.76 1472.21,4002.21 1530,4060 1530,4670 Mos.1
NetMos_2: Mos.2 T?.1 | length 1123.1
  Top Layer w50: Mos.2 1700,4640 1590,4530 1590,3910 T?.1
Netr11_2: r11.2 r12.2 | length 338.4
  Top Layer w25: r11.2 1170,2391 1200,2361 1300,2361 1350.55,2310.45 r12.2
NetR17_1: R17.1 T2.2 T4.1 t5.2 | length 1218.2
  Top Layer w25: T4.1 1410,4370.63 t5.2 1410,4082.5 1346,4018.5 1346,3847 1385.55,3807.45 R17.1
  Bottom Layer w25: T4.1 1408.63,4372 1719,4372 1725,4378 T2.2@1725,4459.37
NetR18_1: R18.1 T2.3 t5.3 | length 746.3
  Top Layer w25: R18.1 1385.55,3997.55 1460,4072 t5.3
  Bottom Layer w25: t5.3 1605,4130 1775,4300 T2.3
Netr19_2: r19.2 R20.2 T4.2 | length 2809.8
  Top Layer w25: R20.2 1385.55,3616.45 1349,3653 1349,3790 v1(1312,3827) 1312,4439.14 1340.52,4467.66 1378.33,4467.66 1379.78,4469.11 1403.48,4469.11 T4.2 ; v1(2436,3827) 2450,3827 2501,3776 2501,3600 2664,3437 2715.45,3437 2744.45,3408 r19.2
  Bottom Layer w25: v1(1312,3827) v1(2436,3827)
VCC: b1.1 c1.1 Mos.3 R17.2 r30.2 T2.1 | length 6880
  Top Layer w25: R17.2@1454.45,3730 R17.2
  Top Layer w50: R17.2@1454.45,3730 1516.95,3667.5 1892.96,3667.5 1932.5,3707.04 1932.5,4162.5 T2.1 1675,4422.45 1657.41,4440.04 1657.41,4507.41 1800,4650 Mos.3 ; b1.1 4195,4605 4195,2558 4339.45,2413.55 r30.2
  Bottom Layer w50: T2.1 1675,4422.45 1665.47,4431.98 1665.47,4499.66 1705.82,4540 1962,4540 2060,4442 3148,4442 c1.1 3490,4650 4070,4650 b1.1
pads on no net: ic1.4 IC5.3 IC5.4 IC5.6 IC5.18 IC5.25 IC5.26 IC5.32 IC5.40 K?.14

## Polygon pours and split planes (outlines as drawn)
GND on Top Layer "GND_L01_P001" (solid, pour order 1): 1015,5115 1015,1050 1035,1030 1040,1035 5255,1035 5255,5090 5225,5120
GND on Bottom Layer "GND_L02_P002" (solid, pour order 2): 1020,5115 1025,5120 5245,5120 5245,1045 5250,1040 5245,1035 1025,1035 1025,5105 1030,5110

## Other copper
Top Layer:
  text "Designed by Axel Vanherle / xelnofear_74" at 2020,1085 h60